# Altium PCB PCB2.PcbDoc
Units mm, origin at the board's own origin, x right, y up, seen from the top; angles counter-clockwise.
Board outline 70 x 68 mm, 2 copper layers (Top Layer, Bottom Layer); 66 components, 52 nets, 264 pads, 2 vias.
Unrouted connection lines stored in the file: 143.
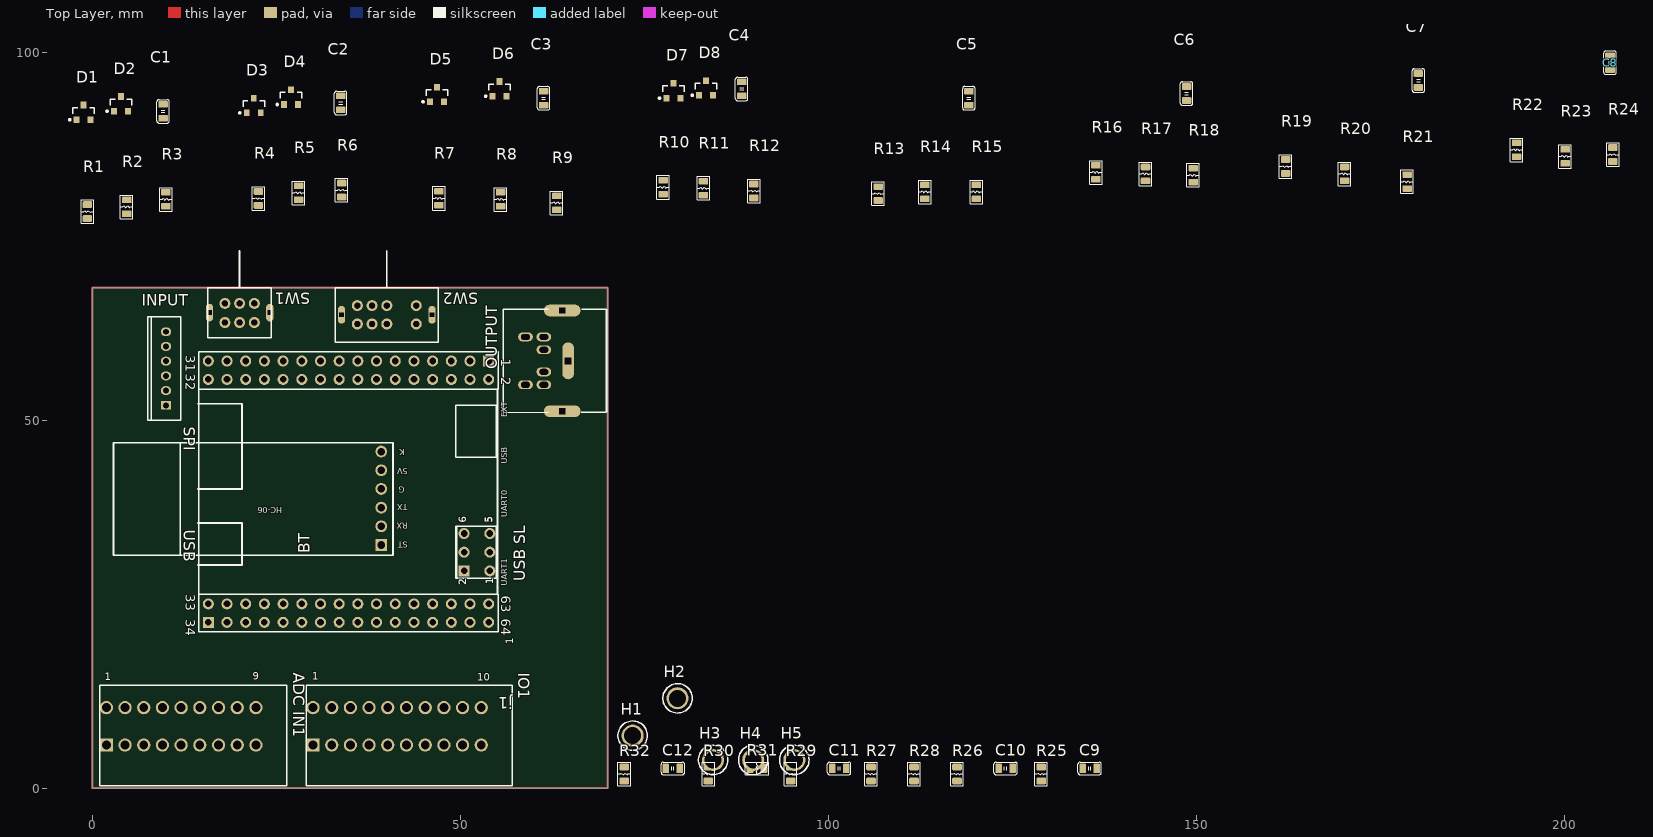
[diagram p0: Top Layer view]
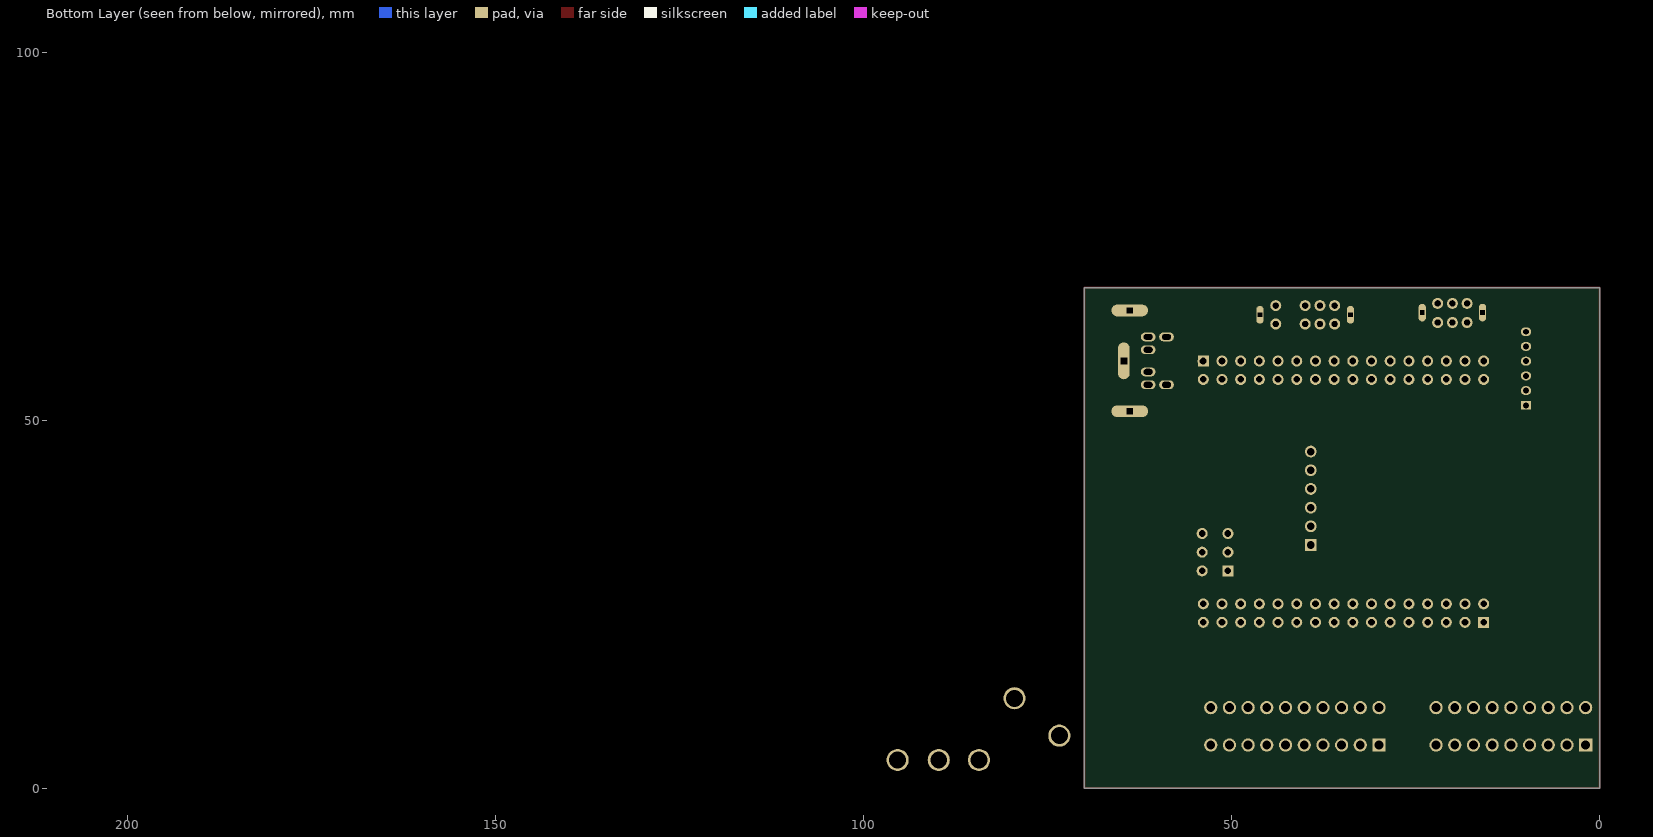
[diagram p1: Bottom Layer view, seen from below]

## Layer stack, top to bottom
Top Solder: solder mask 0.0102, Solder Resist, Dk 3.5
Top Layer: signal copper 0.0356
Dielectric 1: dielectric 0.32, FR-4, Dk 4.8
Bottom Layer: signal copper 0.0356
Bottom Solder: solder mask 0.0102, Solder Resist, Dk 3.5

## Board outline
0,0 0,68 70,68 70,0

## Design rules (kind name [scope] priority, off if disabled: settings)
Clearance [All] p1: gap=0.254 ignorepadtopadclearanceinfootprint=FALSE except(0: Arc-Hole Track-Hole SMDPad-Hole THPad-Hole Via-Hole Fill-Hole Poly-Hole Region-Hole Text-Hole)
PolygonConnect [All] p1: connectstyle=Relief reliefconductorwidth=0.254 reliefentries=4 polygonreliefangle="90 Angle" airgapwidth=0.254
RoomDefinition CON_MCU [InComponentClass('CON_MCU')] p1: confinementstyle=ConfineIn formatcopy=TRUE lockcomponents=FALSE outline -61.214,-32.512 -33.147,-32.512 -33.147,-12.192 -61.214,-12.192
RoomDefinition "ADC SCH" [InComponentClass('ADC SCH')] p2: confinementstyle=ConfineIn formatcopy=TRUE lockcomponents=FALSE outline -83.312,-54.483 -60.706,-54.483 -60.706,-41.402 -83.312,-41.402
RoutingVias [All] p1: holewidth=0.711 width=1.27 viastyle="Through Hole" minholewidth=0.711 minwidth=1.27 maxholewidth=0.711 maxwidth=1.27
SolderMaskExpansion [All] p1: expansion=0.102 istentingtop=FALSE
Width [All] p1: maxlimit=0.254 minlimit=0.254 preferedwidth=0.254
30 further rules are at their usual default settings.

## Classes and differential pairs
component class CON_MCU: "ADC IN1" BT C1 C2 C3 C4 H1 H2 H4 H5 INPUT IO1 j1 OUTPUT R1 R2 R3 R4 R5 R6 R7 R8 SW1 SW2 "USB SL"
component class "ADC SCH": C5 C6 C7 C8 C9 C10 C11 C12 D1 D2 D3 D4 D5 D6 D7 D8 R9 R10 R11 R12 R13 R14 R15 R16 R17 R18 R19 R20 R21 R22 R23 R24 R25 R26 R27 R28 R29 R30 R31 R32

## Components (designator, comment, footprint, x,y, rotation, side; value= is the part's Value field where it differs from the comment)
"ADC IN1" "SL900R-9" SL-900R-9 12.055,8.382 r0 top
BT "HC-06" HC-06 39.243,33.02 r180 top
C1 "1nF" C2012 9.608,91.948 r90 top
C2 "1nF" C2012 33.738,93.091 r90 top
C3 "1nF" C2012 61.297,93.726 r90 top
C4 "1nF" C2012 88.221,94.996 r90 top
C5 "100pF" C2012 119.082,93.726 r90 top
C6 "100pF" C2012 148.673,94.361 r90 top
C7 "100pF" C2012 180.169,96.139 r90 top
C8 "100pF" C2012 206.204,98.552 r90 top
C9 "100pF" C2012 135.509,2.667 r0 top
C10 "100pF" C2012 124.079,2.667 r0 top
C11 "100pF" C2012 101.473,2.667 r0 top
C12 "100pF" C2012 78.867,2.667 r0 top
D1 "MMBZ33VALT1G" ONSC-SOT-23-3-318-08_V -1.187,91.799 r90 top
D2 "MMBZ33VALT1G" ONSC-SOT-23-3-318-08_V 3.893,92.964 r90 top
D3 "MMBZ33VALT1G" ONSC-SOT-23-3-318-08_V 21.927,92.732 r90 top
D4 "MMBZ33VALT1G" ONSC-SOT-23-3-318-08_V 27.007,93.875 r90 top
D5 "MMBZ33VALT1G" ONSC-SOT-23-3-318-08_V 46.819,94.234 r90 top
D6 "MMBZ33VALT1G" ONSC-SOT-23-3-318-08_V 55.328,94.996 r90 top
D7 "MMBZ33VALT1G" ONSC-SOT-23-3-318-08_V 78.95,94.742 r90 top
D8 "MMBZ33VALT1G" ONSC-SOT-23-3-318-08_V 83.395,95.123 r90 top
H1 "HOLE" HOLE_4MM 73.406,7.112 r0 top
H2 "HOLE" HOLE_4MM 79.502,12.192 r0 top
H3 "HOLE" HOLE_4MM 84.328,3.81 r0 top
H4 "HOLE" HOLE_4MM 89.789,3.81 r0 top
H5 "HOLE" HOLE_4MM 95.377,3.81 r0 top
INPUT "2.54mm 6 HOLE" "2.54mm 6 HOLE" 10,52 r90 top
IO1 "SL900R-10" SL-900R-10 41.402,8.382 r0 top
j1 "15x2 2.54mm header" "ATMEL MODULE" 53.848,55.519 r270 top locked
OUTPUT "MD-60S/DIN6PIN" "TAIT-MDS-508B6L_V - duplicate" 69.843,58.039 r180 top
R1 "1K" R2012 -0.679,78.328 r90 top
R2 "10K" R2012 4.655,78.963 r90 top
R3 "1K" R2012 9.989,79.979 r90 top
R4 "10K" R2012 22.562,80.106 r90 top
R5 "1K" R2012 28.023,80.868 r90 top
R6 "10K" R2012 33.865,81.249 r90 top
R7 "1K" R2012 47.073,80.137 r90 top
R8 "10K" R2012 55.455,79.979 r90 top
R9 "1K" R2012 63.075,79.502 r90 top
R10 "1K" R2012 77.553,81.63 r90 top
R11 "1M" R2012 83.014,81.503 r90 top
R12 "1K" R2012 89.872,81.122 r90 top
R13 "1K" R2012 106.763,80.772 r90 top
R14 "1M" R2012 113.113,80.995 r90 top
R15 "1K" R2012 120.098,80.995 r90 top
R16 "1K" R2012 136.354,83.662 r90 top
R17 "1M" R2012 143.085,83.439 r90 top
R18 "1K" R2012 149.562,83.281 r90 top
R19 "1K" R2012 162.135,84.455 r90 top
R20 "1M" R2012 170.136,83.439 r90 top
R21 "1K" R2012 178.645,82.392 r90 top
R22 "1K" R2012 193.504,86.71 r90 top
R23 "1M" R2012 200.108,85.821 r90 top
R24 "1K" R2012 206.585,86.075 r90 top
R25 "1K" R2012 128.905,1.905 r90 top
R26 "1M" R2012 117.475,1.905 r90 top
R27 "1K" R2012 105.791,1.905 r90 top
R28 "1K" R2012 111.633,1.905 r90 top
R29 "1M" R2012 94.869,1.905 r90 top
R30 "1K" R2012 83.693,1.905 r90 top
R31 "1K" R2012 90.297,2.667 r0 top
R32 "1M" R2012 72.263,1.905 r90 top
SW1 "OS202011MA0QN1" OS202011MA0QN1 20,68 r270 top
SW2 "OS203011MA2QP1" OS203011MA2QP1 40,68 r270 top
"USB SL" "Header 3X2" "USB SEL" 54,29.5 r90 top

## Footprints (in the part's own frame and the unit in brackets; to place one, negate y for a bottom-side part, rotate by r counter-clockwise, add the part's x,y. Pads: shape width x height; smd on the part's side, far side on the other; paste and mask are expansions set on the pad)
"2.54mm 6 HOLE" [mm] "Connector; Header; 6 Position"
  rect 1.2x1.4 hole 0.8: 1(0,0)
  oval 1.2x1.4 hole 0.8: 2(2,0) 3(4,0) 4(6,0) 5(8,0) 6(10,0)
  silkscreen extent -2,-2 12,2.5
"ATMEL MODULE" [mm] "Connector; Header; 16x2 Position"
  rect 1.5x1.5 hole 0.9: 1(-2.5,0) 34(33,-38.1)
  round 1.5 hole 0.9: 2(0,0) 3(-2.5,-2.54) 4(0,-2.54) 5(-2.5,-5.08) 6(0,-5.08) 7(-2.5,-7.62) 8(0,-7.62) 9(-2.5,-10.16) 10(0,-10.16) 11(-2.5,-12.7) 12(0,-12.7) 13(-2.5,-15.24) 14(0,-15.24) 15(-2.5,-17.78) 16(0,-17.78) 17(-2.5,-20.32) 18(0,-20.32) 19(-2.5,-22.86) 20(0,-22.86) 21(-2.5,-25.4) 22(0,-25.4) 23(-2.5,-27.94) 24(0,-27.94) 25(-2.5,-30.48) 26(0,-30.48) 27(-2.5,-33.02) 28(0,-33.02) 29(-2.5,-35.56) 30(0,-35.56) 31(-2.5,-38.1) 32(0,-38.1) 33(30.5,-38.1) 35(30.5,-35.56) 36(33,-35.56) 37(30.5,-33.02) 38(33,-33.02) 39(30.5,-30.48) 40(33,-30.48) 41(30.5,-27.94) 42(33,-27.94) 43(30.5,-25.4) 44(33,-25.4) 46(33,-22.86) 47(30.5,-22.86) 47(30.5,-20.32) 48(33,-20.32) 49(30.5,-17.78) 50(33,-17.78) 51(30.5,-15.24) 52(33,-15.24) 53(30.5,-12.7) 54(33,-12.7) 55(30.5,-10.16) 56(33,-10.16) 57(30.5,-7.62) 58(33,-7.62) 59(30.5,-5.08) 60(33,-5.08) 61(30.5,-2.54) 62(33,-2.54) 63(30.5,0) 64(33,0)
  silkscreen extent -3.77,-39.5 34.27,1.27
C2012 [mm]
  rrect30% 0.9x1.3 smd mask+0: 1(-0.95,0) 2(0.95,0)
  silkscreen extent -1.6,-0.85 1.6,0.85, body extent -1,-0.62 1,0.63, height 1.22
HC-06 [mm]
  rect 1.6x1.6 hole 1.02: 1(0,0)
  round 1.6 hole 1.02: 2(0,-2.54) 3(0,-5.08) 4(0,-7.62) 5(0,-10.16) 6(0,-12.7)
  silkscreen extent -1.6,-13.9 36.4,1.4, body extent -6.5,-13.75 36.25,1.25, height 8
HOLE_4MM [mm]
  round 3 hole 2.3 mask+0.127: 1(0,0)
  silkscreen extent -2,-2 2,2
ONSC-SOT-23-3-318-08_V [mm] "SOT23, 3-Leads, Body 2.92x1.3mm, Pitch 0.95mm"
  rect 0.9x0.8 smd: 1(-1,0.95) 2(-1,-0.95) 3(1,0)
  silkscreen extent -1.12,-1.46 0.65,2.02, body extent -0.65,-1.46 0.65,1.46, height 1.11
OS202011MA0QN1 [mm] "Mini DIN Connector"
  round 1.5 hole 0.8: 1(4.75,2) 2(4.75,0) 3(4.75,-2) 4(2.15,2) 5(2.15,0) 6(2.15,-2)
  oval 2.4x1 hole 0.6 square: MH1(3.4,4.1) MH2(3.4,-4.1)
  silkscreen extent -5,-4.3 6.8,4.3
OS203011MA2QP1 [mm] "Mini DIN Connector"
  round 1.5 hole 0.8: 1(4.95,4) 2(4.95,0) 3(4.95,-2) 4(4.95,-4) 5(2.45,4) 6(2.45,0) 7(2.45,-2) 8(2.45,-4)
  oval 2.4x1 hole 0.6 square: MH1(3.7,6.15) MH2(3.7,-6.15)
  silkscreen extent -5,-7 7.4,7
R2012 [mm]
  rrect30% 0.9x1.3 smd mask+0: 1(-0.95,0) 2(0.95,0)
  silkscreen extent -1.6,-0.85 1.6,0.85, body extent -1,-0.62 1,0.63, height 0.59
SL-900R-9 [mm] "Connector; Header; 11x2 Position"
  round 1.8 hole 1.2: 0(-10.16,2.54) 0(-7.62,2.54) 0(-5.08,2.54) 0(-2.54,2.54) 0(0,2.54) 0(2.54,2.54) 0(5.09,2.54) 0(7.62,2.54) 0(10.16,2.54) 2(-7.62,-2.54) 3(-5.08,-2.54) 4(-2.54,-2.54) 5(0,-2.54) 6(2.54,-2.54) 7(5.09,-2.54) 8(7.62,-2.54) 9(10.16,-2.54)
  rect 1.8x1.8 hole 1.2: 1(-10.16,-2.54)
  silkscreen extent -11.06,-8.04 14.34,5.56, body extent -11.06,-8.04 11.8,5.56, height 13.29
SL-900R-10 [mm] "Connector; Header; 11x2 Position"
  round 1.8 hole 1.2: 0(-11.43,2.54) 0(-8.89,2.54) 0(-6.35,2.54) 0(-3.81,2.54) 0(-1.27,2.54) 0(1.27,2.54) 0(3.82,2.54) 0(6.35,2.54) 0(8.89,2.54) 0(11.43,2.54) 2(-8.89,-2.54) 3(-6.35,-2.54) 4(-3.81,-2.54) 5(-1.27,-2.54) 6(1.27,-2.54) 7(3.82,-2.54) 8(6.35,-2.54) 9(8.89,-2.54) 10(11.43,-2.54)
  rect 1.8x1.8 hole 1.2: 1(-11.43,-2.54)
  silkscreen extent -12.33,-8.04 15.62,5.56, body extent -12.33,-8.04 13.07,5.56, height 13.29
"TAIT-MDS-508B6L_V - duplicate" [mm] "Mini DIN Connector"
  oval 2x1.2 hole 1.2 slot 0.8 at 90 deg: 1(8.5,-1.5) 2(8.5,1.5) 3(8.5,-3.25) 4(8.5,3.25) 5(11,-3.25) 6(11,3.25)
  oval 1.6x5 hole 0.9 square unplated: 7(5.2,0)
  oval 5x1.6 hole 0.8 square: MH1(6,-6.85) MH2(6,6.85)
  silkscreen extent -0.05,-7 14,7.02, body extent -0.1,-7.03 12.7,6.97, height 13
"USB SEL" [mm] "Connector; Header; 11x2 Position"
  rect 1.5x1.5 hole 0.9: 1(0,3.5)
  round 1.5 hole 0.9: 2(2.54,3.5) 3(5.08,3.5) 4(0,0) 5(2.54,0) 6(5.08,0)
  silkscreen extent -1,-1 6.08,4.5

## Part data
"ADC IN1": library part "Header 9", "Header, 9-Pin", LatestRevisionDate=17-Jul-2002, LatestRevisionNote="Re-released for DXP Platform.", Publisher="Altium Limited"
BT INPUT: library part "Header 6", "Header, 6-Pin", LatestRevisionDate=17-Jul-2002, LatestRevisionNote="Re-released for DXP Platform.", Publisher="Altium Limited"
C1 C2 C3 C4 C5 C6 C7 C8 C9 C10 C11 C12: library part CAP, Manufacturer="AVX Interconnect / Elco", Part Number=08051A102JAT2A
D1 D2 D3 D4 D5 D6 D7 D8: library part ONSC-K1K2A3-3, "40 W Peak Power Zener Transient Voltage Suppressor, Dual Common Anode Zeners for ESD Protection, 3-Pin SOT-23, Pb-Free, Tape and Reel", Manufacturer="On Semiconductor", ComponentLink1Description="Manufacturer URL", ComponentLink1URL=http://www.onsemi.com/, ComponentLink2Description=Datasheet, ComponentLink2URL=http://www.onsemi.com/pub_link/Collateral/MMBZ5V6ALT1-D.PDF, ComponentLink3Description="Package Specification", ComponentLink3URL=http://www.onsemi.cn/pub_link/Collateral/318-08.PDF, DatasheetVersion="Rev. 13", Direction=Unidirectional, IR Max (uA)=0.05, Mounting Technology="Surface Mount", PackageDescription="3-Pin Small Outline Transistor, Body 2.92 x 1.3 mm, Pitch 0.95 mm", PackageReference=SOT-23-3-318-08, PackageVersion="Rev. AP, 11/2009", Packing="Tape and Reel", PartNumber=MMBZ33VALT1G, PPK Max (W)=40, RoHS=Pb-Free, V(BR) Typ (V)=33
H1 H2 H3 H4 H5: library part MH
IO1: library part "Header 10", "Header, 10-Pin", LatestRevisionDate=17-Jul-2002, LatestRevisionNote="Re-released for DXP Platform.", Publisher="Altium Limited"
j1: library part Component_1
OUTPUT: library part CUI-MD-60S-6, "Right Angle Mini DIN Connector, 100 Vac, 12 Vdc, -40 to 85 degC, 6-Pin THD, RoHS, Bulk", Current Rating=1A,2A, Manufacturer="CUI Inc", Operating Temperature=-40°C~85°C, Package Description="6-Pin Through Hole Device, Body 14 x 12.4 mm, Height 13.1 mm", Package Reference=MD-60S, Standard Package=300, Voltage - Rated=100VAC,12VDC, 3D Model=MD-60S, Category=Connectors,Interconnects, Connector Type=Receptacle,FemaleSockets, Contact Finish=Silver, Contact Finish Thickness=-, Datasheet URL=http://www.cui.com/product/resource/md-xxs.pdf, Datasheet Version="Rev. 1.02, 03/2012", Family=CircularConnectors, Fastening Type=Push-Pull, Features=-, Ingress Protection=-, Manufacturer URL=http://www.cui.com/, Mating Products=CP-2060-ND-CONNMINI-DIN6PINMALE, Mounting Technology=ThroughHole, Mounting Type=ThroughHole,RightAngle, Number of Positions=6, Online Catalog=MD, Orientation=Keyed, Other Names=045-0036RCP-2460MD60S, Packaging=Bulk, RoHS Information=MD-x0SCertofCompliance, Series=MD, Shell Material, Finish=PolybutyleneTerephthalate(PBT), Shell Size - Insert=MiniDIN, Shell Size, MIL=-, Termination=Solder
R1 R2 R3 R4 R5 R6 R7 R8 R9 R10 R11 R12 R13 R14 R15 R16 R17 R18 R19 R20 R21 R22 R23 R24 R25 R26 R27 R28 R29 R30 R31 R32: library part RES-2, "Chip Resistor, 4.7 KOhm, +/- 1%, 0.125 W, -55 to 155 degC, 0805 (2012 Metric), RoHS, Tape and Reel", Case Code (Imperial)=0805, Case Code (Metric)=2012, Manufacturer="Vishay Semiconductor", Max Operating Temperature=155degC, Max Power Dissipation=125mW, Min Operating Temperature=-55degC, Package Description="2-Pin Surface Mount Device, Body 2.05 x 1.25 mm", Package Quantity=10, Resistance=4.7KOhm, Temperature Coefficient=100ppm/degreesC, Tolerance=1%, Voltage Rating=150V, Case/Package=0805, Composition=ThickFilm, Contact Plating=Tin, Datasheet URL=https://datasheet.ciiva.com/11808/0900766b80d98b26-11808992.pdf, Datasheet Version=41061.0, Depth=1.25mm, Height=0.45mm, Lead Free=LeadFree, Length=2mm, Manufacturer URL=http://www.vishay.com/, Military Standard=Not, Number of Terminations=2, Package Reference=0805, Packaging=TapeandReel, Power Rating=125mW, Radiation Hardening=No, REACH SVHC=Unknown, RoHSCompliant=true, Termination=SMD/SMT, Voltage Rating (DC)=150V, Weight=0.000194oz, Width=1.25mm
SW1: library part SW-DPDT-6, "Slide Switch, MHS Series, Double Pole, Vertical, 125 V (AC), -20 to 85 degC, 6-Pin THD, RoHS, Bulk", ComponentLink1Description="Manufacturer URL", ComponentLink1URL=http://www.te.com/, ComponentLink2Description=Datasheet, ComponentLink2URL=http://www.te.com/commerce/DocumentDelivery/DDEController?Action=showdoc&DocId=Catalog+Section%7F1308111-1_SWITCHES_CORE_PROGRAM_CATALOG%7F0308%7Fpdf%7FEnglish%7FENG_CS_1308111-1_SWITCHES_CORE_PROGRAM_CATALOG_0308.pdf%7F1825289-1, ComponentLink3Description="Package Specification", ComponentLink3URL=http://www.te.com/commerce/DocumentDelivery/DDEController?Action=showdoc&DocId=Customer+Drawing%7F1825289%7FB3%7Fpdf%7FEnglish%7FENG_CD_1825289_B3.pdf%7F1825289-1, DatasheetVersion=Mar-08, PackageDescription="6-Pin Through Hole Device, Body 16 x 6.7 mm, Height 12.05 mm", PackageReference=1825289-1
SW2: library part CMP-17877-000002-1, "SWITCH SLIDE DP3T 200MA 30V", Contact Resistance=20mΩ, Current Rating=0.2A, Manufacturer=E-Switch, Manufacturer Part Number=EG2301, Temperature="-20°C to +70°C", Temperature Range High=+70°C, Temperature Range Low=-20°C, Voltage Rating Dc=30V, Automotive=No, Category=Switch, ComponentLink2Description=Datasheet, ComponentLink2URL=https://www.e-switch.com/system/asset/product_line/data_sheet/119/EG.pdf, Device Class L1=Electromechanical, Device Class L2=Switches, Device Class L3="Slide Switches", Digikey Description="SWITCH SLIDE DP3T 200MA 30V", Electromechanical Life=10000Cycles, Footprint Url=http://spec_sheets.e-switch.com/specs/P040180.pdf, Height=11.8mm, Lead Free=Yes, Manufacturer 1=E-Switch, Manufacturer Part Number 1=EG2301, Mount="Through Hole", Mouser Description="Slide Switches DP3T PC MNT SLIDE", Octopart=https://octopart.com/eg2301-e-switch-1438660, Package=EG2301, RoHS=TRUE, Throw Configuration=DP3T
"USB SL": "Header, 3-Pin, Dual row", LatestRevisionDate=17-Jul-2002, LatestRevisionNote="Re-released for DXP Platform.", Publisher="Altium Limited"

## Via types
v1: diameter 1.27, hole 0.711, Top Layer to Bottom Layer, 2 vias

## Nets (pads, with @x,y where several pads share a name; then routed paths per layer and width w, separated by ;. In a path a pad name is that pad's centre, name@x,y a point inside that pad or via, vN(x,y) a via of type N, cw(c..) or ccw(c..) an arc to the next point about the centre after c; other vN are vias at no path point)
5V: BT.5 D1.2 D2.2 D3.2 D4.2 D5.2 D6.2 D7.2 D8.2 INPUT.4 IO1.10 j1.23 j1.24 j1.52 OUTPUT.4 R1.2 R3.2 R5.2 R7.2
12V: INPUT.6 OUTPUT.6
ADC_IN_0: "ADC IN1.1" R9.2 R11.1
ADC_IN_1: "ADC IN1.2" R15.2 R17.1
ADC_IN_2: "ADC IN1.3" R21.2 R23.1
ADC_IN_3: "ADC IN1.4" R27.2 R29.1
ADC_IN_4: "ADC IN1.5" R12.2 R14.1
ADC_IN_5: "ADC IN1.6" R18.2 R20.1
ADC_IN_6: "ADC IN1.7" R24.2 R26.1
ADC_IN_7: "ADC IN1.8" R30.2 R32.1
BT(RX0): BT.2 SW1.4
BT(TX0): BT.3 SW1.1
GND: "ADC IN1.9" BT.4 C1.1 C2.1 C3.1 C4.1 C5.2 C6.2 C7.2 C8.2 C9.2 C10.2 C11.2 C12.2 D1.1 D2.1 D3.1 D4.1 D5.1 D6.1 D7.1 D8.1 INPUT.3 IO1.9 j1.21 j1.22 j1.53 j1.63 OUTPUT.3 OUTPUT.7 R11.2 R14.2 R17.2 R20.2 R23.2 R26.2 R29.2 R32.2 SW1.MH1 SW1.MH2 SW2.MH1 SW2.MH2
IN_RX(SDA): INPUT.1 SW2.6
IN_TX(SCL): INPUT.5 OUTPUT.5 SW2.2 SW2.4
NetD1_3: D1.3 R9.1 R10.2
NetD2_3: D2.3 R12.1 R13.2
NetD3_3: D3.3 R15.1 R16.2
NetD4_3: D4.3 R18.1 R19.2
NetD5_3: D5.3 R21.1 R22.2
NetD6_3: D6.3 R24.1 R25.2
NetD7_3: D7.3 R27.1 R28.2
NetD8_3: D8.3 R30.1 R31.2
NetSW2_1: "USB SL.2" SW2.1
NetSW2_5: "USB SL.1" SW2.5
OUT_RX(SDA): OUTPUT.1 SW2.8
PD0_1(SCL): j1.25 SW2.3
PD1_1(SDA): j1.26 SW2.7
PE0_1(RX0): "USB SL.6" SW1.2
PE1_1(TX0): "USB SL.5" SW1.5
PE2_1: IO1.5 j1.4
PE3_1: IO1.6 j1.5
PE4_1: IO1.7 j1.6
PE5_1: IO1.8 j1.7
PF0_1(ADC0): C5.1 j1.61 R10.1
PF1_1(ADC1): C7.1 j1.60 R16.1
PF2_1(ADC2): C9.1 j1.59 R22.1
PF3_1(ADC3): C11.1 j1.58 R28.1
PF4_1(ADC4): C6.1 j1.57 R13.1
PF5_1(ADC5): C8.1 j1.56 R19.1
PF6_1(ADC6): C10.1 j1.55 R25.1
PF7_1(ADC7): C12.1 j1.54 R31.1
PG0_1: j1.33 R2.1
PG1_1: j1.34 R4.1
PG2_1: j1.43 R6.1
PG3_1: j1.18 R8.1
SW_IN_1: C1.2 IO1.1 R1.1 R2.2
SW_IN_2: C2.2 IO1.2 R3.1 R4.2
SW_IN_3: C3.2 IO1.3 R5.1 R6.2
SW_IN_4: C4.2 IO1.4 R7.1 R8.2
USB_RX: "USB SL.3" SW1.6
USB_TX: "USB SL.4" SW1.3
  other v1: 54,29.5
pads on no net: "ADC IN1.0" BT.1 BT.6 H1.1 H2.1 H3.1 H4.1 H5.1 INPUT.2 IO1.0 j1.1 j1.2 j1.3 j1.8 j1.9 j1.10 j1.11 j1.12 j1.13 j1.14 j1.15 j1.16 j1.17 j1.19 j1.20 j1.27 j1.28 j1.29 j1.30 j1.31 j1.32 j1.35 j1.36 j1.37 j1.38 j1.39 j1.40 j1.41 j1.42 j1.44 j1.46 j1.47 j1.48 j1.49 j1.50 j1.51 j1.62 j1.64 OUTPUT.2 OUTPUT.MH1 OUTPUT.MH2
copper on no net: | length 276
  Top Layer w0.254: 0,0 0,68 70,68 70,0 0,0
  other v1: 54,58

## Dimensions
0,0 to 0,68 on Drill Drawing

## Text inside footprints (layer, text, board x,y; h text height)
"ADC IN1": Top Overlay "1" at 1.695,14.642 h1; Top Overlay "9" at 21.795,14.742 h1
BT: Top Overlay "K" at 42.443,46.04 h0.8 r180; Top Overlay "5V" at 42.843,43.44 h0.8 r180; Top Overlay "G" at 42.443,40.94 h0.8 r180; Top Overlay "TX" at 42.843,38.54 h0.8 r180; Top Overlay "RX" at 42.843,36.04 h0.8 r180; Top Overlay "ST" at 42.843,33.44 h0.8 r180
IO1: Top Overlay "1" at 29.872,14.734 h1; Top Overlay "10" at 52.272,14.542 h1
j1: Top Overlay "6" at 50.8,36.068 h1 r90; Top Overlay "1" at 54.483,27.686 h1 r90; Top Overlay "2" at 50.8,27.559 h1 r90; Top Overlay "5" at 54.356,36.068 h1 r90; Top Overlay "USB" at 56.394,44.073 h0.8 r90; Top Overlay "EXT" at 56.394,50.373 h0.8 r90; Top Overlay "UART1" at 56.394,27.473 h0.8 r90; Top Overlay "USB" at 12.402,35.065 h1.52 r270; Top Overlay "SPI" at 12.402,49.065 h1.52 r270; Top Overlay "1" at 55.543,58.319 h1.27 r270; Top Overlay "64" at 55.543,23.019 h1.27 r270; Top Overlay "63" at 55.543,26.119 h1.27 r270; Top Overlay "2" at 55.543,55.819 h1.27 r270; Top Overlay "31" at 12.707,58.819 h1.27 r270; Top Overlay "33" at 12.707,26.319 h1.27 r270; Top Overlay "34" at 12.707,22.919 h1.27 r270; Top Overlay "UART0" at 56.394,36.773 h0.8 r90; Top Overlay "32" at 12.707,56.319 h1.27 r270
OUTPUT: Top 3D Body "PCB Edge" at 68.7,64.77 h0.8 r270
"USB SL": Top Overlay "5" at 54.381,36.028 h1 r90; Top Overlay "2" at 50.825,27.595 h1 r90; Top Overlay "1" at 54.483,27.686 h1 r90; Top Overlay "1" at 57.175,19.518 h1 r90; Top Overlay "6" at 50.825,36.028 h1 r90